# EAGLE board imu (EAGLE 5.11)
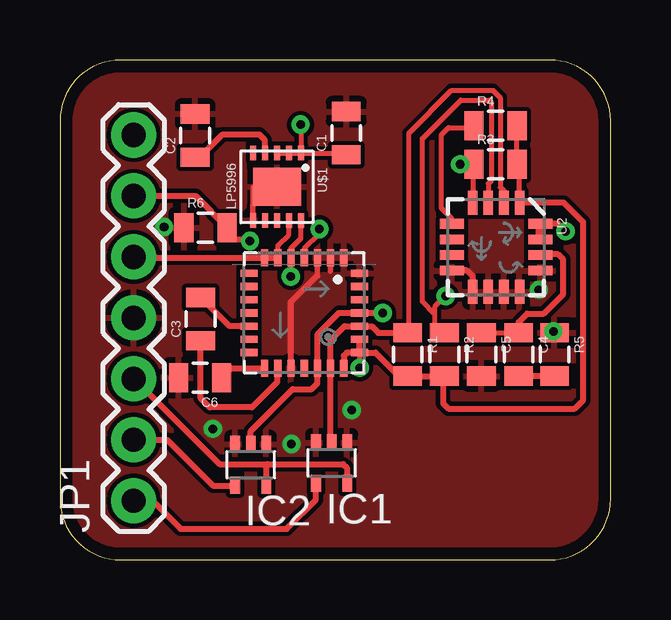
[diagram p0: board, top side]
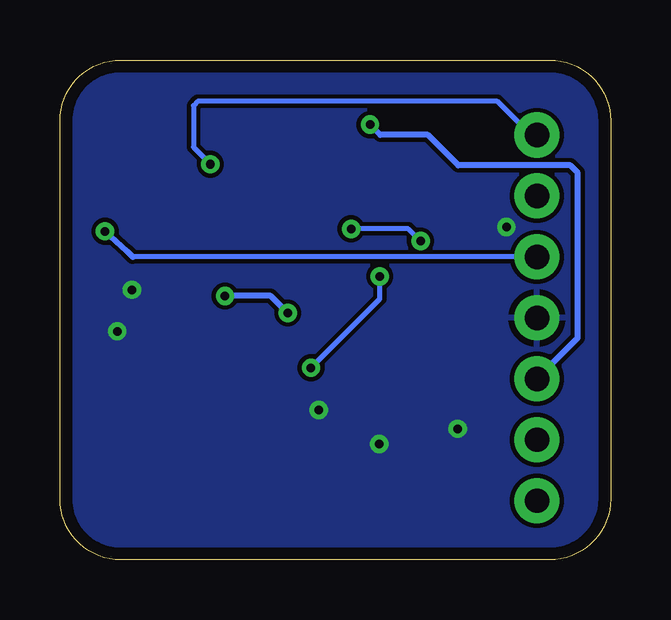
[diagram p1: board, bottom side, seen from below]

Size 22.96 x 20.83 mm. Coordinates in mm from the lower left corner, seen from the top.
Outline: 20.42,0 arc90 22.96,2.54 22.96,18.29 arc90 20.42,20.83 2.54,20.83 arc90 0,18.29 0,2.54 arc90 2.54,0 20.42,0
Copper layers (1*16): Top 0.0356mm / dielectric 1.5011mm / Bottom 0.0356mm
Design rules "SilverCircuits *": minimum track width 7mil, minimum drill 14mil, track to track 7mil, track to pad 7mil, pad to pad 7mil, via to via 7mil, smd to smd 0mil, copper to edge 20mil, drill to drill 8mil, minimum pad ring 10mil, minimum via ring 8mil, stop-mask expansion 4mil, vias tented up to drill 15mil, thermal gap 10mil
Net classes: 1 power: width 0.406 mm

## Footprints (pad centres in the part's own frame; a part is rotated, then mirrored left to right if it is on the bottom)
0805 = smd 0.8 x 1.2: 1 -0.9,0; 2 0.9,0
74XX-LITTLE-DE_SC70-5 = smd 0.4 x 0.7: 1 -0.65,-0.85; 2 0,-0.85; 3 0.65,-0.85; 4 0.65,0.85; 5 -0.65,0.85
1X07 = drill 1.016 pad 1.88 round: 1 0,0; 2 2.54,0; 3 5.08,0; 4 7.62,0; 5 10.16,0; 6 12.7,0; 7 15.24,0
LGA28-5X5 = smd 0.7 x 0.3: 1 -2.3,1.65; 2 -2.3,1.1; 3 -2.3,0.55; 4 -2.3,0; 5 -2.3,-0.55; 6 -2.3,-1.1; 7 -2.3,-1.65; 15 2.3,-1.65; 16 2.3,-1.1; 17 2.3,-0.55; 18 2.3,0; 19 2.3,0.55; 20 2.3,1.1; 21 2.3,1.65 | smd 0.3 x 0.7: 8 -1.65,-2.3; 9 -1.1,-2.3; 10 -0.55,-2.3; 11 0,-2.3; 12 0.55,-2.3; 13 1.1,-2.3; 14 1.65,-2.3; 22 1.65,2.3; 23 1.1,2.3; 24 0.55,2.3; 25 0,2.3; 26 -0.55,2.3; 27 -1.1,2.3; 28 -1.65,2.3
LGA16-4X4 = smd 1 x 0.4: 1 -1.85,0.975; 2 -1.85,0.325; 3 -1.85,-0.325; 4 -1.85,-0.975; 9 1.85,-0.975; 10 1.85,-0.325; 11 1.85,0.325; 12 1.85,0.975 | smd 0.4 x 1: 5 -0.975,-1.85; 6 -0.325,-1.85; 7 0.325,-1.85; 8 0.975,-1.85; 13 0.975,1.85; 14 0.325,1.85; 15 -0.325,1.85; 16 -0.975,1.85
LLP-10 = smd 0.25 x 0.6: P$1 -1,-1.4; P$2 -0.5,-1.4; P$3 0,-1.4; P$4 0.5,-1.4; P$5 1,-1.4; P$6 1,1.4; P$7 0.5,1.4; P$8 0,1.4; P$9 -0.5,1.4; P$10 -1,1.4 | smd 2 x 1.6: P$11 0,0

## Placement (x,y rotation side)
C1  1uF  [0805]  11.94,17.78 90 top
C2  10nF  [0805]  5.64,17.68 90 top
C3  .22uF  [0805]  5.87,10.03 90 top
C4  470nF  [0805]  19.13,8.56 270 top
C5  10nF  [0805]  17.58,8.56 270 top
C6  4.7uF  [0805]  5.84,7.59 180 top
IC1  74AHC1G  [74XX-LITTLE-DE_SC70-5]  11.33,4.04 180 top
IC2  74AHC1G  [74XX-LITTLE-DE_SC70-5]  7.95,3.96 180 top
JP1  [1X07]  3.07,2.46 90 top
R1  4.7k  [0805]  14.5,8.56 270 top
R2  4.7k  [0805]  16.03,8.56 270 top
R3  10k  [0805]  18.16,16.48 0 top
R4  10k  [0805]  18.16,18.08 0 top
R5  10k  [0805]  20.62,8.56 270 top
R6  10k  [0805]  6.07,13.84 0 top
U1  LSM303DLHSMD  [LGA28-5X5]  10.19,10.29 270 top
U2  L3G4200D  [LGA16-4X4]  18.19,13.03 270 top
U$1  LP5996  [LLP-10]  9.04,15.54 180 top

## Library data of the parts
C1-C6 JP1 R1-R6 U2 = SparkFun
IC1 IC2 = avrcanbus
U1 = imu
U$1 = pcbqr

## Nets
1V8: R1.2 R2.2 R3.2 R4.2 U1.5 U1.21 U1.22 U1.23 U2.1 U$1.P$10
3V3: JP1.5 U1.6 U1.7 U2.15 U2.16 U$1.P$9
5V: C1.1 IC1.5 IC2.5 JP1.3 U$1.P$1 U$1.P$2 U$1.P$3
GND: C1.2 C2.2 C5.2 C6.2 IC1.1 IC1.3 IC2.1 IC2.3 JP1.4 R5.1 R6.1 U1.1 U1.2 U1.3 U1.17 U1.28 U2.8 U2.9 U2.10 U2.11 U2.12 U2.13 U$1.P$6 U$1.P$11
N$1: C6.1 U1.15
N$97: C3.1 U1.16
N$98: C3.2 U1.12
N$102: C4.1 C5.1 U2.14
N$103: C4.2 R5.2
N$109: C2.1 U$1.P$4
N$110: R4.1 U2.5
SA0_A: JP1.6 R6.2 U1.4
SA0_G: JP1.7 R3.1 U2.4
SCL: IC1.2 R1.1 U1.20 U1.24 U2.2
SCL_MCU: IC1.4 JP1.1
SDA: IC2.2 R2.1 U1.19 U1.25 U2.3
SDA_MCU: IC2.4 JP1.2

## Tracks (layer width: path | path; a pad name or v marks a point on that pad's centre or on a via)
1V8  (via drill 0.36)
  Top 0.203: R4.2 R3.2 19.16,16.38 U2.1 | U$1.P$10 10.04,13.39 9.63,12.98 9.63,12.6 U1.5 9.64,11.82 v9.63,11.81 | U1.23 12.5,9.18 v12.5,8
  Top 0.254: U1.21 11.84,8.51 11.96,8.64 U1.22 | U1.22 U1.23 | U1.22 12.51,8.61 12.54,8.64 13.16,8.64 14.13,7.66 R1.2 R2.2 15.98,7.61 15.98,6.53 16.21,6.3 21.46,6.3 21.82,6.65 21.82,14.07 21.01,14.88 U2.1
  Bottom 0.203: v12.5,8 9.63,10.87 v9.63,11.81
3V3  (via drill 0.36)
  Top 0.203: U1.6 9.09,12.59 9.09,13.11 9.54,13.56 U$1.P$9
  Top 0.254: U1.6 U1.7 3.11,12.59 JP1.5 | U2.16 20.77,14 v21.08,13.69
  Top 0.406: U2.16 U2.15
  Bottom 0.203: JP1.5 19.93,12.62
  Bottom 0.254: v21.08,13.69 20.16,12.85 19.93,12.62
5V  (via drill 0.36)
  Top 0.203: JP1.3 3.1,7.54 | 11.96,3.2 IC1.5 | 8.64,3.99 8.6,3.95 | v10.03,18.14 v10.04,18.13 U$1.P$1 11.87,16.94 C1.1
  Top 0.254: 3.1,7.54 6.65,3.99 8.64,3.99 11.81,3.99 11.96,3.84 11.96,3.2 | 8.6,3.95 IC2.5 | U$1.P$1 U$1.P$2 U$1.P$3
  Bottom 0.254: v10.03,18.14 9.6,17.7 7.62,17.7 6.35,16.43 1.68,16.43 1.37,16.13 1.37,9.25 JP1.3
GND  (via drill 0.36)
  Top 0.203: U$1.P$6 8.05,15.54 U$1.P$11 | 10.72,11.84 10.74,11.85 U1.3 | 11.28,12.5 11.28,12.01
  Top 0.254: U1.17 9.64,10.75 10.72,11.84 | U2.8 16.35,12.06 16.97,12.06 17.21,11.82 U2.9 | 11.28,12.5 11.29,12.5 U1.2 | v20.57,9.52 R5.1
  other vias: 9.65,4.83 4.34,13.87 6.38,5.46 19.96,11.25 12.17,6.25
  pour Bottom: -0.08,20.68 23.27,20.83 23.39,-0.25 0.05,-0.41
  pour Top: -0.43,21.11 23.77,21.11 23.77,-0.66 -0.43,-0.66
N$1
  Top 0.254: C6.1 7.13,7.99 U1.15
N$97
  Top 0.254: C3.1 5.87,6.73 6.25,6.35 8,6.35 9.07,7.42 9.07,7.97 U1.16
N$98
  Top 0.254: C3.2 7.06,9.74 U1.12
N$102
  Top 0.203: C5.1 C4.1
  Top 0.254: U2.14 20.06,12.73 20.78,12.73 20.98,12.52 20.98,11.07 20.17,10.26 19.48,10.26 19.13,9.91 C4.1
N$103
  Top 0.254: R5.2 C4.2
N$109
  Top 0.254: U$1.P$4 8.53,17.5 8.31,17.73 6.78,17.73 5.83,16.78 C2.1
N$110
  Top 0.203: R4.1 17.18,18.01 16.21,18.01 15.9,17.7 15.9,14.66 16.34,14.22 U2.5
SA0_A  (via drill 0.36)
  Top 0.203: R6.2 7.11,13.7 7.11,13.41 7.16,13.36 | U1.4 10.19,12.95 10.82,13.59 v10.82,13.79
  Top 0.254: R6.2 5.65,15.16 JP1.6 | v7.92,13.28 7.85,13.36 7.16,13.36
  Bottom 0.203: v7.92,13.28 8.43,13.79 v10.82,13.79
SA0_G  (via drill 0.36)
  Top 0.203: 17.21,16.43 R3.1 | 17.21,16.43 U2.4 | 17.21,16.43 17.16,16.48 v16.69,16.48
  Bottom 0.203: v16.69,16.48 17.4,17.2 17.4,18.92 17.22,19.1 4.72,19.1 3.33,17.7 JP1.7
SCL
  Top 0.203: R1.1 14.55,9.51 14.55,17.78 16.33,19.56 18.06,19.56 18.36,19.25 18.36,15.52 18.51,15.37 U2.2
  Top 0.254: IC1.2 11.29,4.93 U1.20 11.28,7.99 11.28,9.14 11.87,9.74 U1.24 12.49,9.73 13,9.73 13.27,9.46 R1.1
SCL_MCU
  Top 0.203: IC1.4
  Top 0.254: JP1.1 3.86,2.46 5.03,1.3 9.45,1.3 10.67,2.51 IC1.4
SDA  (via drill 0.36)
  Top 0.203: R2.1 15.62,9.46 15.62,10.26 | 15.62,10.26 15.11,10.77 15.11,17.55 16.71,19.15 17.91,19.15 17.98,19.08 17.98,15.8 17.86,15.68 U2.3 | v16.08,11 15.62,10.54 15.62,10.26
  Top 0.254: IC2.2 7.95,5.36 9.7,7.11 10.49,7.11 10.74,7.36 U1.19 10.74,8 10.74,9.4 11.63,10.29 U1.25 v13.46,10.29
  Bottom 0.254: v13.46,10.29 14.17,11 v16.08,11
SDA_MCU
  Top 0.203: 7.29,3.1 IC2.4
  Top 0.254: JP1.2 4.47,5 6.38,3.1 7.29,3.1